# Altium PCB A1_v31.PcbDoc (part 3 of 6)
Units mil, origin at the board's own origin, x right, y up, seen from the top; angles counter-clockwise.
Board outline 3937.01 x 3149.61 mil, 2 copper layers (Top Layer, Bottom Layer); 94 components, 93 nets, 325 pads, 43 vias.
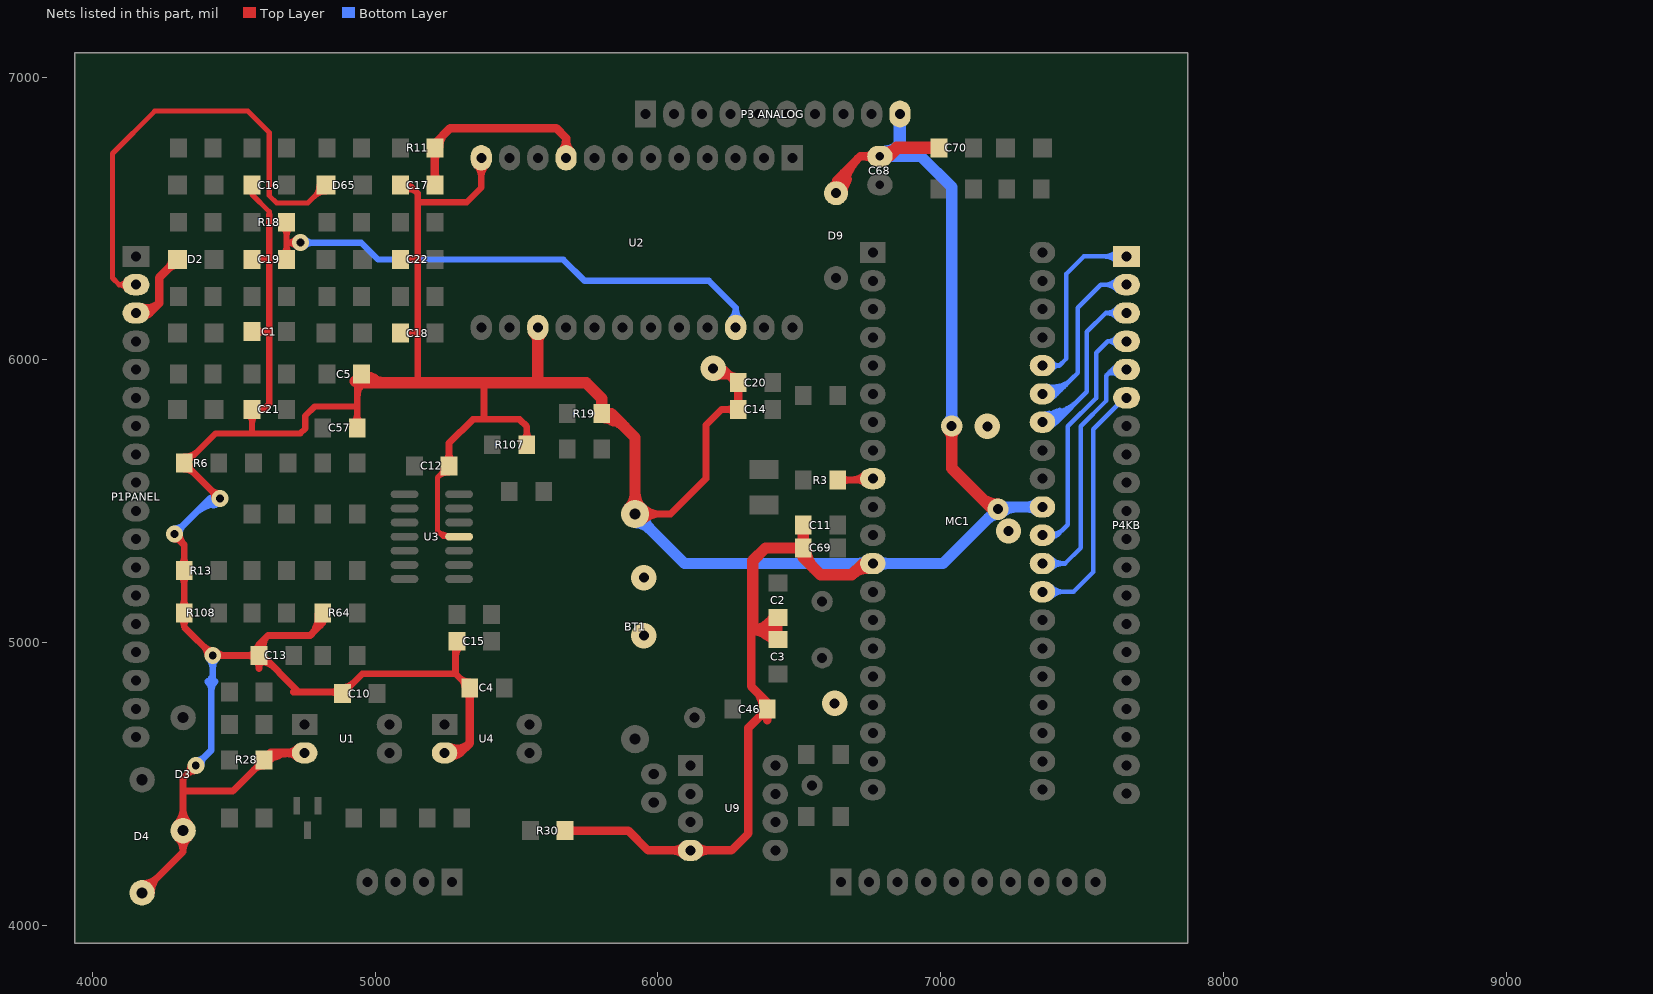
[diagram p3: the nets of this part, all layers, seen from the top]

## Via types
v1: diameter 60, hole 28, Top Layer to Bottom Layer, 30 vias
v2: diameter 90, hole 35.43, Top Layer to Bottom Layer, 6 vias
v3: diameter 75, hole 28, Top Layer to Bottom Layer, 5 vias
v4: diameter 75, hole 35.43, Top Layer to Bottom Layer, 2 vias

## Nets (pads, with @x,y where several pads share a name; then routed paths per layer and width w, separated by ;. In a path a pad name is that pad's centre, name@x,y a point inside that pad or via, vN(x,y) a via of type N, cw(c..) or ccw(c..) an arc to the next point about the centre after c; other vN are vias at no path point) (continued)
GND: "P3 ANALOG.10" BT1.2 C1.1 C2.1 C3.1 C4.1 C5.1 C10.1 C11.1 C12.1 C13.2 C14.1 C15.2 C16.1 C17.1 C18.1 C19.1 C20.1 C21.1 C22.1 C46.1 C57.2 C68.2 C69.1 C70.2 D3.1 D4.1 D9.1 MC1.12 MC1.31 R6.2 R13.1 R19.1 R28.1 R30.2 R64.1 R107.2 R108.1 U1.2 U2.12 U2.15 U3.11 U4.2 U9.4 | length 38769
  Top Layer w18: C16.1@4563.98,6618.61 4563.98,6585.56 4625,6524.54 4625,6515 ; 5246.88,5381.19 ccw(c5254.41,5389.83) U3.11@5259.08,5379.37 ; C12.1@5261.02,5625 5220,5583.98 ; U3.11@5296.46,5375 5240,5375 5220,5395 ; 5220,5395 ccw(c5257.07,5432.07) U3.11@5260.69,5379.77 ; 5220,5395 ccw(c5257.07,5432.07) U3.11@5260.69,5379.77 ; 5220,5395 ccw(c5257.07,5432.07) U3.11@5260.69,5379.77 ; 5220,5395 5220,5583.98 ; 5220,5583.98 cw(c5259.99,5543.99) C12.1@5260.75,5600.54 ; 5220,5583.98 cw(c5259.99,5543.99) C12.1@5260.75,5600.54 ; 5220,5583.98 cw(c5259.99,5543.99) C12.1@5260.75,5600.54 ; 5228.77,5592.74 ccw(c5200.44,5621.06) C12.1@5240.5,5621.06 ; 5228.77,5592.74 ccw(c5200.44,5621.06) C12.1@5240.5,5621.06 ; 5228.77,5592.74 ccw(c5200.44,5621.06) C12.1@5240.5,5621.06 ; 5239.64,5383.88 cw(c5234.41,5357.08) U3.11@5257.06,5372.33 ; 5239.64,5383.88 cw(c5234.41,5357.08) U3.11@5257.06,5372.33 ; 5239.64,5383.88 cw(c5234.41,5357.08) U3.11@5257.06,5372.33
  Top Layer w22: R6.2@4323.98,5635 4330,5635 4435,5740 4735,5740 4752.2,5757.2 4752.2,5802.2 4785,5835 4931.02,5835 4936.02,5840 ; R6.2@4323.98,5657.46 ccw(c4323.98,5726.24) 4372.61,5677.61 ; 4563.98,5748.98 C21.1@4563.98,5825 4605,5825 ; C1.1@4563.98,6100 4625,6100 ; C19.1@4563.98,6355.82 4620.82,6355.82 4625,6360 ; 4625,6515 4625,6360 ; C18.1@5088.98,6095 5150,6095 ; C22.1@5088.98,6355.82 5149.18,6355.82 5150,6355 ; C17.1@5088.98,6618.61 5121.39,6618.61 ; 5150,5919 5150,6095 ; U2.12@5375,6715 5375,6610 5323.14,6558.14 5156.86,6558.14 5150,6565 ; v2(6195,5970) 6233.98,5970 C20.1@6283.98,5920 ; 6243.6,5943.89 ccw(c6263.25,5977.93) C20.1@6277.34,5941.23 ; 6244.32,5956.83 ccw(c6271.8,5972.7) C20.1@6279.49,5941.91 ; 6249.87,5940.27 cw(c6232.47,5910.14) C20.1@6266.08,5919.14 ; C21.1@4550.88,5807.96 cw(c4519.25,5776.33) 4563.98,5776.33 ; C21.1@4550.88,5807.96 cw(c4519.25,5776.33) 4563.98,5776.33 ; C21.1@4550.88,5807.96 cw(c4519.25,5776.33) 4563.98,5776.33 ; 4563.98,5776.33 cw(c4608.71,5776.33) C21.1@4577.08,5807.96 ; 4563.98,5776.33 cw(c4608.71,5776.33) C21.1@4577.08,5807.96 ; 4563.98,5776.33 cw(c4608.71,5776.33) C21.1@4577.08,5807.96 ; C1.1@4577.08,6086.9 cw(c4608.71,6055.27) 4608.71,6100 ; C1.1@4577.08,6086.9 cw(c4608.71,6055.27) 4608.71,6100 ; C1.1@4577.08,6086.9 cw(c4608.71,6055.27) 4608.71,6100 ; C1.1@4577.08,6113.1 ccw(c4608.71,6144.73) 4608.71,6100 ; C1.1@4577.08,6113.1 ccw(c4608.71,6144.73) 4608.71,6100 ; C1.1@4577.08,6113.1 ccw(c4608.71,6144.73) 4608.71,6100 ; C19.1@4577.08,6342.72 cw(c4608.71,6311.09) 4608.71,6355.82 ; C19.1@4577.08,6342.72 cw(c4608.71,6311.09) 4608.71,6355.82 ; C19.1@4577.08,6342.72 cw(c4608.71,6311.09) 4608.71,6355.82 ; C19.1@4577.08,6368.92 ccw(c4608.71,6400.55) 4608.71,6355.82 ; C19.1@4577.08,6368.92 ccw(c4608.71,6400.55) 4608.71,6355.82 ; C19.1@4577.08,6368.92 ccw(c4608.71,6400.55) 4608.71,6355.82 ; C21.1@4577.88,5812.75 cw(c4605,5788.85) 4605,5825 ; C21.1@4577.88,5812.75 cw(c4605,5788.85) 4605,5825 ; C21.1@4577.88,5812.75 cw(c4605,5788.85) 4605,5825 ; C21.1@4577.88,5837.25 ccw(c4605,5861.15) 4605,5825 ; C21.1@4577.88,5837.25 ccw(c4605,5861.15) 4605,5825 ; C21.1@4577.88,5837.25 ccw(c4605,5861.15) 4605,5825 ; 4605,5825 4625,5845 4625,6100 ; 4625,6100 4625,6360 ; C17.1@5087.39,6617.76 cw(c5103.62,6586.24) 5128.69,6611.31 ; C17.1@5087.39,6617.76 cw(c5103.62,6586.24) 5128.69,6611.31 ; C17.1@5087.39,6617.76 cw(c5103.62,6586.24) 5128.69,6611.31 ; C17.1@5097.46,6598.2 cw(c5118.12,6558.12) 5150,6590 ; C17.1@5097.46,6598.2 cw(c5118.12,6558.12) 5150,6590 ; C17.1@5097.46,6598.2 cw(c5118.12,6558.12) 5150,6590 ; C18.1@5102.08,6081.9 cw(c5133.71,6050.27) 5133.71,6095 ; C18.1@5102.08,6081.9 cw(c5133.71,6050.27) 5133.71,6095 ; C18.1@5102.08,6081.9 cw(c5133.71,6050.27) 5133.71,6095 ; C18.1@5102.08,6108.1 ccw(c5133.71,6139.73) 5133.71,6095 ; C18.1@5102.08,6108.1 ccw(c5133.71,6139.73) 5133.71,6095 ; C18.1@5102.08,6108.1 ccw(c5133.71,6139.73) 5133.71,6095 ; C22.1@5102.08,6342.72 cw(c5133.71,6311.09) 5133.71,6355.82 ; C22.1@5102.08,6342.72 cw(c5133.71,6311.09) 5133.71,6355.82 ; C22.1@5102.08,6342.72 cw(c5133.71,6311.09) 5133.71,6355.82 ; C22.1@5102.08,6368.92 ccw(c5133.71,6400.55) 5133.71,6355.82 ; C22.1@5102.08,6368.92 ccw(c5133.71,6400.55) 5133.71,6355.82 ; C22.1@5102.08,6368.92 ccw(c5133.71,6400.55) 5133.71,6355.82 ; C17.1@5104.94,6609.2 cw(c5121.39,6599.51) 5121.39,6618.61 ; C17.1@5104.94,6609.2 cw(c5121.39,6599.51) 5121.39,6618.61 ; C17.1@5104.94,6609.2 cw(c5121.39,6599.51) 5121.39,6618.61 ; C17.1@5104.94,6628.01 ccw(c5121.39,6637.7) 5121.39,6618.61 ; C17.1@5104.94,6628.01 ccw(c5121.39,6637.7) 5121.39,6618.61 ; C17.1@5104.94,6628.01 ccw(c5121.39,6637.7) 5121.39,6618.61 ; 5121.39,6618.61 5150,6590 ; 5150,6095 5150,6355 ; 5150,6355 5150,6565 ; 5150,6565 5150,6590 ; U2.12@5356.26,6688.76 cw(c5311.02,6643.52) 5375,6643.52 ; U2.12@5356.26,6688.76 cw(c5311.02,6643.52) 5375,6643.52 ; U2.12@5356.26,6688.76 cw(c5311.02,6643.52) 5375,6643.52 ; 5375,6643.52 cw(c5438.98,6643.52) U2.12@5393.74,6688.76 ; 5375,6643.52 cw(c5438.98,6643.52) U2.12@5393.74,6688.76 ; 5375,6643.52 cw(c5438.98,6643.52) U2.12@5393.74,6688.76 ; v2@6188.46,5962.44 ccw(c6246.03,6028.97) 6252.37,5941.22 ; v2@6188.46,5962.44 ccw(c6246.03,6028.97) 6252.37,5941.22 ; v2@6188.46,5962.44 ccw(c6246.03,6028.97) 6252.37,5941.22 ; v2@6198.93,5958.66 cw(c6218,5903.69) C20.1@6259.14,5944.84 ; v2@6198.93,5958.66 cw(c6218,5903.69) C20.1@6259.14,5944.84 ; v2@6198.93,5958.66 cw(c6218,5903.69) C20.1@6259.14,5944.84 ; v2@6201.08,5959.65 cw(c6217.13,5932.31) 6239.55,5954.73 ; v2@6201.08,5959.65 cw(c6217.13,5932.31) 6239.55,5954.73 ; v2@6201.08,5959.65 cw(c6217.13,5932.31) 6239.55,5954.73 ; v2@6201.08,5959.65 cw(c6217.13,5932.31) 6239.55,5954.73 ; v2@6206.14,5937.88 cw(c6230.79,5866.82) C20.1@6283.98,5920 ; v2@6206.14,5937.88 cw(c6230.79,5866.82) C20.1@6283.98,5920 ; v2@6206.14,5937.88 cw(c6230.79,5866.82) C20.1@6283.98,5920 ; v2@6212.21,5940.68 cw(c6232.02,5906.95) C20.1@6259.67,5934.61 ; v2@6212.21,5940.68 cw(c6232.02,5906.95) C20.1@6259.67,5934.61 ; v2@6212.21,5940.68 cw(c6232.02,5906.95) C20.1@6259.67,5934.61 ; v2@6212.21,5940.68 cw(c6232.02,5906.95) C20.1@6259.67,5934.61 ; v2@6236.2,5958.08 cw(c6204.14,5902.55) C20.1@6266.08,5919.14 ; v2@6236.2,5958.08 cw(c6204.14,5902.55) C20.1@6266.08,5919.14 ; v2@6236.2,5958.08 cw(c6204.14,5902.55) C20.1@6266.08,5919.14 ; 6245.63,5958.35 ccw(c6283.98,5996.7) C20.1@6283.98,5942.46 ; 6245.63,5958.35 ccw(c6283.98,5996.7) C20.1@6283.98,5942.46 ; 6245.63,5958.35 ccw(c6283.98,5996.7) C20.1@6283.98,5942.46 ; 6251.96,5938.48 cw(c6237.19,5912.9) C20.1@6265.94,5919.68 ; 6251.96,5938.48 ccw(c6262.14,5956.12) C20.1@6273.57,5939.27 ; 6251.96,5938.48 cw(c6237.19,5912.9) C20.1@6265.94,5919.68 ; 6251.96,5938.48 ccw(c6262.14,5956.12) C20.1@6273.57,5939.27 ; 6251.96,5938.48 ccw(c6262.14,5956.12) C20.1@6273.57,5939.27 ; 6251.96,5938.48 cw(c6237.19,5912.9) C20.1@6265.94,5919.68 ; C20.1@6255.13,5948.84 cw(c6230.22,5923.94) C20.1@6265.45,5923.94 ; C20.1@6255.13,5948.84 cw(c6230.22,5923.94) C20.1@6265.45,5923.94 ; C20.1@6255.13,5948.84 cw(c6230.22,5923.94) C20.1@6265.45,5923.94 ; C20.1@6259.96,5944.36 ccw(c6272.62,5966.3) C20.1@6279.18,5941.83 ; C20.1@6259.96,5944.36 ccw(c6272.62,5966.3) C20.1@6279.18,5941.83 ; C20.1@6259.96,5944.36 ccw(c6272.62,5966.3) C20.1@6279.18,5941.83
  Top Layer w24: D4.1@4175,4115 4320,4260 ; v1(4290,5385) 4290,5380 4323.98,5346.02 R13.1@4323.98,5255 R108.1@4323.98,5105 4323.98,5056.02 v1(4425,4955) C13.2@4588.98,4955 ; R6.2@4323.98,5635 4448.98,5510 v1(4450,5510) ; v1(4365,4565) 4320,4520 4320,4475 ; v1@4407,4955 ccw(c4363.54,4955) 4394.27,4985.73 ccw(c4425,5016.46) v1@4425,4973 ; v1@4437.73,4967.73 ccw(c4468.46,4998.46) 4468.46,4955 ; C13.2@4588.98,4933.54 cw(c4588.98,4855.1) 4644.44,4910.56 ; C13.2@4588.98,4946.02 C13.2@4588.98,4955 ; C13.2@4598.98,4956.02 4720,4835 ; R28.1@4606.02,4585 4496.02,4475 4320,4475 ; 4710,4825 4868.98,4825 4883.98,4840 C10.1@4886.46,4840 ; R64.1@4813.98,5105 4813.98,5068.98 ; C10.1@4883.98,4820 4953.98,4890 5283.98,4890 ; C57.2@4939.02,5743 4936.02,5740 C57.2@4936.02,5760 4936.02,5840 4936.02,5935 C5.1@4951.02,5950 ; C12.1@5261.02,5625 5261.02,5706.02 5345,5790 5385,5790 ; C15.2@5288.98,4975 5283.98,4970 5283.98,4890 ; C4.1@5333.98,4840 5283.98,4890 ; 5385,5919 5385,5790 ; R107.2@5536.02,5700 5536.02,5763.98 5510,5790 5385,5790 ; BT1.2@5919,5454.99 6044.99,5454.99 6170,5580 6170,5770 6225,5825 C14.1@6283.98,5825 ; D4.1@4175,4148 ccw(c4175,4227.67) 4231.33,4171.33 ; D4.1@4175,4148 ccw(c4175,4227.67) 4231.33,4171.33 ; D4.1@4175,4148 ccw(c4175,4227.67) 4231.33,4171.33 ; D4.1@4208,4115 cw(c4287.67,4115) 4231.33,4171.33 ; D4.1@4208,4115 cw(c4287.67,4115) 4231.33,4171.33 ; D4.1@4208,4115 cw(c4287.67,4115) 4231.33,4171.33 ; v1@4290,5367 cw(c4290,5335.62) 4312.19,5357.81 ; v1@4290,5367 cw(c4290,5335.62) 4312.19,5357.81 ; v1@4290,5367 cw(c4290,5335.62) 4312.19,5357.81 ; D3.1@4296.67,4358.33 ccw(c4240.33,4414.67) 4320,4414.67 ; D3.1@4296.67,4358.33 ccw(c4240.33,4414.67) 4320,4414.67 ; D3.1@4296.67,4358.33 ccw(c4240.33,4414.67) 4320,4414.67 ; D3.1@4297.71,4310.67 cw(c4251.28,4260) 4320,4260 ; D3.1@4297.71,4310.67 cw(c4251.28,4260) 4320,4260 ; D3.1@4297.71,4310.67 cw(c4251.28,4260) 4320,4260 ; v1@4308,5384.9 ccw(c4362.54,5384.59) 4323.97,5346.03 ; v1@4308,5384.9 ccw(c4362.54,5384.59) 4323.97,5346.03 ; v1@4308,5384.9 ccw(c4362.54,5384.59) 4323.97,5346.03 ; R108.1@4311.58,5088.67 cw(c4281.66,5058.75) 4323.98,5058.75 ; R108.1@4311.58,5088.67 cw(c4281.66,5058.75) 4323.98,5058.75 ; R108.1@4311.58,5088.67 cw(c4281.66,5058.75) 4323.98,5058.75 ; R108.1@4311.58,5121.33 ccw(c4281.66,5151.25) 4323.98,5151.25 ; R108.1@4311.58,5121.33 ccw(c4281.66,5151.25) 4323.98,5151.25 ; R108.1@4311.58,5121.33 ccw(c4281.66,5151.25) 4323.98,5151.25 ; R13.1@4311.58,5238.67 cw(c4281.66,5208.75) 4323.98,5208.75 ; R13.1@4311.58,5238.67 cw(c4281.66,5208.75) 4323.98,5208.75 ; R13.1@4311.58,5238.67 cw(c4281.66,5208.75) 4323.98,5208.75 ; R13.1@4311.58,5271.33 ccw(c4281.66,5301.25) 4323.98,5301.25 ; R13.1@4311.58,5271.33 ccw(c4281.66,5301.25) 4323.98,5301.25 ; R13.1@4311.58,5271.33 ccw(c4281.66,5301.25) 4323.98,5301.25 ; 4320,4260 cw(c4388.72,4260) D3.1@4342.29,4310.67 ; 4320,4260 cw(c4388.72,4260) D3.1@4342.29,4310.67 ; 4320,4260 cw(c4388.72,4260) D3.1@4342.29,4310.67 ; 4320,4260 D3.1@4320,4335 4320,4475 ; 4320,4414.67 ccw(c4399.67,4414.67) D3.1@4343.33,4358.33 ; 4320,4414.67 ccw(c4399.67,4414.67) D3.1@4343.33,4358.33 ; 4320,4414.67 ccw(c4399.67,4414.67) D3.1@4343.33,4358.33 ; 4323.98,5058.75 cw(c4366.29,5058.75) R108.1@4336.37,5088.67 ; 4323.98,5058.75 cw(c4366.29,5058.75) R108.1@4336.37,5088.67 ; 4323.98,5058.75 cw(c4366.29,5058.75) R108.1@4336.37,5088.67 ; 4323.98,5151.25 ccw(c4366.29,5151.25) R108.1@4336.37,5121.33 ; 4323.98,5151.25 ccw(c4366.29,5151.25) R108.1@4336.37,5121.33 ; 4323.98,5151.25 ccw(c4366.29,5151.25) R108.1@4336.37,5121.33 ; 4323.98,5208.75 cw(c4366.29,5208.75) R13.1@4336.37,5238.67 ; 4323.98,5208.75 cw(c4366.29,5208.75) R13.1@4336.37,5238.67 ; 4323.98,5208.75 cw(c4366.29,5208.75) R13.1@4336.37,5238.67 ; 4323.98,5301.25 ccw(c4366.29,5301.25) R13.1@4336.37,5271.33 ; 4323.98,5301.25 ccw(c4366.29,5301.25) R13.1@4336.37,5271.33 ; 4323.98,5301.25 ccw(c4366.29,5301.25) R13.1@4336.37,5271.33 ; R6.2@4323.98,5613.54 cw(c4323.98,5561.72) 4360.62,5598.36 ; R6.2@4323.98,5613.54 cw(c4323.98,5561.72) 4360.62,5598.36 ; R6.2@4323.98,5613.54 cw(c4323.98,5561.72) 4360.62,5598.36 ; 4334.27,4534.27 cw(c4365,4503.54) v1@4365,4547 ; 4334.27,4534.27 ccw(c4303.54,4565) v1@4347,4565 ; 4334.27,4534.27 ccw(c4303.54,4565) v1@4347,4565 ; 4334.27,4534.27 cw(c4365,4503.54) v1@4365,4547 ; 4334.27,4534.27 ccw(c4303.54,4565) v1@4347,4565 ; 4334.27,4534.27 cw(c4365,4503.54) v1@4365,4547 ; R6.2@4341.5,5631.06 ccw(c4374.31,5631.06) R6.2@4351.11,5607.86 ; R6.2@4341.5,5631.06 ccw(c4374.31,5631.06) R6.2@4351.11,5607.86 ; R6.2@4341.5,5631.06 ccw(c4374.31,5631.06) R6.2@4351.11,5607.86 ; 4417.52,5541.45 ccw(c4450,5573.93) v1@4450,5528 ; 4417.52,5541.45 ccw(c4450,5573.93) v1@4450,5528 ; 4417.52,5541.45 ccw(c4450,5573.93) v1@4450,5528 ; 4420,5538.98 cw(c4391.02,5510) v1@4432,5510 ; 4420,5538.98 cw(c4391.02,5510) v1@4432,5510 ; 4420,5538.98 cw(c4391.02,5510) v1@4432,5510 ; 4546.66,4955 cw(c4546.66,4912.68) C13.2@4576.58,4942.61 ; 4546.66,4955 ccw(c4546.66,4997.32) C13.2@4576.58,4967.39 ; 4546.66,4955 ccw(c4546.66,4997.32) C13.2@4576.58,4967.39 ; 4546.66,4955 cw(c4546.66,4912.68) C13.2@4576.58,4942.61 ; 4546.66,4955 ccw(c4546.66,4997.32) C13.2@4576.58,4967.39 ; 4546.66,4955 cw(c4546.66,4912.68) C13.2@4576.58,4942.61 ; 4569.38,4548.36 cw(c4606.02,4511.72) R28.1@4606.02,4563.54 ; 4569.38,4548.36 cw(c4606.02,4511.72) R28.1@4606.02,4563.54 ; 4569.38,4548.36 cw(c4606.02,4511.72) R28.1@4606.02,4563.54 ; C13.2@4578.47,4972.96 ccw(c4562.72,4993.97) 4588.98,4993.97 ; C13.2@4578.47,4972.96 ccw(c4562.72,4993.97) 4588.98,4993.97 ; C13.2@4578.47,4972.96 ccw(c4562.72,4993.97) 4588.98,4993.97 ; R28.1@4578.89,4557.86 ccw(c4555.69,4581.06) R28.1@4588.5,4581.06 ; R28.1@4578.89,4557.86 ccw(c4555.69,4581.06) R28.1@4588.5,4581.06 ; R28.1@4578.89,4557.86 ccw(c4555.69,4581.06) R28.1@4588.5,4581.06 ; C13.2@4582.83,4956.91 cw(c4620.55,4969.37) 4592.46,4997.46 ; C13.2@4582.83,4956.91 cw(c4620.55,4969.37) 4592.46,4997.46 ; C13.2@4582.83,4956.91 cw(c4620.55,4969.37) 4592.46,4997.46 ; 4588.98,4908.75 ccw(c4546.66,4908.75) 4576.58,4938.67 cw(c4546.66,4908.75) 4588.98,4908.75 ; 4588.98,4908.75 cw(c4631.29,4908.75) 4601.37,4938.67 ccw(c4631.29,4908.75) 4588.98,4908.75 ; C13.2@4588.98,4955 4588.98,4993.98 4620,5025 ; 4588.98,4993.97 ccw(c4615.23,4993.97) C13.2@4599.49,4972.96 ; 4588.98,4993.97 ccw(c4615.23,4993.97) C13.2@4599.49,4972.96 ; 4588.98,4993.97 ccw(c4615.23,4993.97) C13.2@4599.49,4972.96 ; C13.2@4593.81,4954.63 ccw(c4562.32,4982.7) C13.2@4604.43,4985.11 ; C13.2@4593.81,4954.63 ccw(c4562.32,4982.7) C13.2@4604.43,4985.11 ; C13.2@4593.81,4954.63 ccw(c4562.32,4982.7) C13.2@4604.43,4985.11 ; C13.2@4605.62,4964.44 cw(c4661.95,4983.05) 4620,5025 ; C13.2@4605.62,4964.44 cw(c4661.95,4983.05) 4620,5025 ; C13.2@4605.62,4964.44 cw(c4661.95,4983.05) 4620,5025 ; 4620,5025 4770,5025 ; 4770,5025 ccw(c4704.84,5090.16) R64.1@4796.54,5099.32 ; 4770,5025 ccw(c4704.84,5090.16) R64.1@4796.54,5099.32 ; 4770,5025 ccw(c4704.84,5090.16) R64.1@4796.54,5099.32 ; 4770,5025 4813.98,5068.98 ; R64.1@4804.51,5086.31 cw(c4793.37,5068.98) 4813.98,5068.98 ; R64.1@4804.51,5086.31 cw(c4793.37,5068.98) 4813.98,5068.98 ; R64.1@4804.51,5086.31 cw(c4793.37,5068.98) 4813.98,5068.98 ; 4805.82,5060.82 ccw(c4769.97,5096.67) R64.1@4820.42,5101.71 ; 4805.82,5060.82 ccw(c4769.97,5096.67) R64.1@4820.42,5101.71 ; 4805.82,5060.82 ccw(c4769.97,5096.67) R64.1@4820.42,5101.71 ; 4813.98,5068.98 cw(c4834.58,5068.98) R64.1@4823.45,5086.31 ; 4813.98,5068.98 cw(c4834.58,5068.98) R64.1@4823.45,5086.31 ; 4813.98,5068.98 cw(c4834.58,5068.98) R64.1@4823.45,5086.31 ; 4839.09,4825 cw(c4839.09,4779.06) C10.1@4871.58,4811.54 ; 4839.09,4825 cw(c4839.09,4779.06) C10.1@4871.58,4811.54 ; 4839.09,4825 cw(c4839.09,4779.06) C10.1@4871.58,4811.54 ; 4844.23,4825 ccw(c4844.23,4863.69) C10.1@4871.58,4836.33 ; 4844.23,4825 ccw(c4844.23,4863.69) C10.1@4871.58,4836.33 ; 4844.23,4825 ccw(c4844.23,4863.69) C10.1@4871.58,4836.33 ; C10.1@4883.98,4841.46 ccw(c4883.98,4893.28) 4920.62,4856.64 ; C10.1@4883.98,4841.46 ccw(c4883.98,4893.28) 4920.62,4856.64 ; C10.1@4883.98,4841.46 ccw(c4883.98,4893.28) 4920.62,4856.64 ; C10.1@4901.5,4823.94 cw(c4934.31,4823.94) C10.1@4911.11,4847.14 ; C10.1@4901.5,4823.94 cw(c4934.31,4823.94) C10.1@4911.11,4847.14 ; C10.1@4901.5,4823.94 cw(c4934.31,4823.94) C10.1@4911.11,4847.14 ; C57.2@4923.63,5776.33 ccw(c4893.71,5806.25) 4936.02,5806.25 ; C57.2@4923.63,5776.33 ccw(c4893.71,5806.25) 4936.02,5806.25 ; C57.2@4923.63,5776.33 ccw(c4893.71,5806.25) 4936.02,5806.25 ; 4936.02,5806.25 ccw(c4978.34,5806.25) C57.2@4948.42,5776.33 ; 4936.02,5806.25 ccw(c4978.34,5806.25) C57.2@4948.42,5776.33 ; 4936.02,5806.25 ccw(c4978.34,5806.25) C57.2@4948.42,5776.33 ; 4936.02,5867.53 cw(c5029.55,5867.53) C5.1@4963.42,5933.67 ; 4936.02,5867.53 cw(c5029.55,5867.53) C5.1@4963.42,5933.67 ; 4936.02,5867.53 cw(c5029.55,5867.53) C5.1@4963.42,5933.67 ; C5.1@4939.11,5933.21 cw(c4920.93,5913.58) 4944.1,5900.21 ; C5.1@4939.11,5933.21 cw(c4920.93,5913.58) 4944.1,5900.21 ; C5.1@4939.11,5933.21 cw(c4920.93,5913.58) 4944.1,5900.21 ; C12.1@5248.63,5641.33 ccw(c5218.71,5671.25) 5261.02,5671.25 ; C12.1@5248.63,5641.33 ccw(c5218.71,5671.25) 5261.02,5671.25 ; C12.1@5248.63,5641.33 ccw(c5218.71,5671.25) 5261.02,5671.25 ; 5261.02,5671.25 ccw(c5303.34,5671.25) C12.1@5273.42,5641.33 ; 5261.02,5671.25 ccw(c5303.34,5671.25) C12.1@5273.42,5641.33 ; 5261.02,5671.25 ccw(c5303.34,5671.25) C12.1@5273.42,5641.33 ; C15.2@5276.58,4988.67 cw(c5258.73,4970.82) 5283.98,4970.82 ; C15.2@5276.58,4988.67 cw(c5258.73,4970.82) 5283.98,4970.82 ; C15.2@5276.58,4988.67 cw(c5258.73,4970.82) 5283.98,4970.82 ; C15.2@5276.58,4988.67 cw(c5258.73,4970.82) 5283.98,4970.82 ; C15.2@5276.58,4988.67 cw(c5258.73,4970.82) 5283.98,4970.82 ; C15.2@5276.58,4988.67 cw(c5258.73,4970.82) 5283.98,4970.82 ; 5283.98,4946.68 cw(c5343.36,4946.68) C15.2@5301.37,4988.67 ; 5283.98,4946.68 cw(c5343.36,4946.68) C15.2@5301.37,4988.67 ; 5283.98,4946.68 cw(c5343.36,4946.68) C15.2@5301.37,4988.67 ; 5283.98,4969.6 cw(c5299.68,4969.6) C15.2@5294.62,4984.47 ; 5283.98,4969.6 cw(c5299.68,4969.6) C15.2@5294.62,4984.47 ; 5283.98,4969.6 cw(c5299.68,4969.6) C15.2@5294.62,4984.47 ; 5297.33,4876.64 ccw(c5333.98,4913.28) C4.1@5333.98,4861.46 ; 5297.33,4876.64 ccw(c5333.98,4913.28) C4.1@5333.98,4861.46 ; 5297.33,4876.64 ccw(c5333.98,4913.28) C4.1@5333.98,4861.46 ; C4.1@5306.84,4867.14 cw(c5283.64,4843.94) C4.1@5316.45,4843.94 ; C4.1@5306.84,4867.14 cw(c5283.64,4843.94) C4.1@5316.45,4843.94 ; C4.1@5306.84,4867.14 cw(c5283.64,4843.94) C4.1@5316.45,4843.94 ; R107.2@5523.63,5716.33 ccw(c5493.71,5746.25) 5536.02,5746.25 ; R107.2@5523.63,5716.33 ccw(c5493.71,5746.25) 5536.02,5746.25 ; R107.2@5523.63,5716.33 ccw(c5493.71,5746.25) 5536.02,5746.25 ; 5536.02,5746.25 ccw(c5578.34,5746.25) R107.2@5548.42,5716.33 ; 5536.02,5746.25 ccw(c5578.34,5746.25) R107.2@5548.42,5716.33 ; 5536.02,5746.25 ccw(c5578.34,5746.25) R107.2@5548.42,5716.33 ; BT1.2@5945.87,5428.12 cw(c6010.74,5363.25) 6010.74,5454.99 ; BT1.2@5945.87,5428.12 cw(c6010.74,5363.25) 6010.74,5454.99 ; BT1.2@5945.87,5428.12 cw(c6010.74,5363.25) 6010.74,5454.99 ; BT1.2@5945.87,5481.86 ccw(c6010.74,5546.73) 6010.74,5454.99 ; BT1.2@5945.87,5481.86 ccw(c6010.74,5546.73) 6010.74,5454.99 ; BT1.2@5945.87,5481.86 ccw(c6010.74,5546.73) 6010.74,5454.99 ; 6241.66,5825 cw(c6241.66,5782.68) C14.1@6271.58,5812.61 ; 6241.66,5825 ccw(c6241.66,5867.32) C14.1@6271.58,5837.39 ; 6241.66,5825 ccw(c6241.66,5867.32) C14.1@6271.58,5837.39 ; 6241.66,5825 cw(c6241.66,5782.68) C14.1@6271.58,5812.61 ; 6241.66,5825 ccw(c6241.66,5867.32) C14.1@6271.58,5837.39 ; 6241.66,5825 cw(c6241.66,5782.68) C14.1@6271.58,5812.61
  Top Layer w30: R28.1@4606.02,4585 4631.02,4610 U1.2@4750,4610 ; U4.2@5245,4610 5300,4610 ; C4.1@5333.98,4840 5333.98,4643.98 5300,4610 ; R30.2@5671.02,4335 5895,4335 5965,4265 U9.4@6115,4265 6260,4265 6320,4325 6320,4698.98 C46.1@6386.02,4765 6386.02,4788.98 6330,4845 6330,5285 6335,5290 ; R30.2@5681.3,4324.73 cw(c5706.1,4299.93) 5706.1,4335 cw(c5706.1,4370.07) R30.2@5681.3,4345.27 ; U9.4@6091.59,4249.09 ccw(c6053.18,4210.68) 6053.18,4265 ccw(c6053.18,4319.32) U9.4@6091.59,4280.91 ; U9.4@6138.41,4249.09 cw(c6176.82,4210.68) 6176.82,4265 cw(c6176.82,4319.32) U9.4@6138.41,4280.91 ; C14.1@6283.98,5825 C20.1@6283.98,5920 ; 6354.5,4733.48 cw(c6386.02,4701.96) C46.1@6386.02,4746.54 ; C3.1@6425,5011.02 C2.1@6425,5088.98 ; D9.1@6630,6565 D9.1@6630,6590 6630,6635 ; D9.1@6641.38,6615.04 ccw(c6649.08,6631.98) 6662.24,6618.82 ccw(c6677.93,6603.13) D9.1@6656.52,6597.26 ; C68.2@6815,6720 C68.2@6785,6720 6715,6720 6630,6635 ; R28.1@4612.95,4601.71 ccw(c4634.56,4641.58) 4657.24,4602.3 ; R28.1@4612.95,4601.71 ccw(c4634.56,4641.58) 4657.24,4602.3 ; R28.1@4612.95,4601.71 ccw(c4634.56,4641.58) 4657.24,4602.3 ; R28.1@4616.3,4578.66 cw(c4691.95,4503.01) 4691.95,4610 ; R28.1@4616.3,4578.66 cw(c4691.95,4503.01) 4691.95,4610 ; R28.1@4616.3,4578.66 cw(c4691.95,4503.01) 4691.95,4610 ; 4688.18,4610 cw(c4688.18,4555.68) U1.2@4726.59,4594.09 ; 4688.18,4610 ccw(c4688.18,4664.32) U1.2@4726.59,4625.91 ; 4688.18,4610 ccw(c4688.18,4664.32) U1.2@4726.59,4625.91 ; 4688.18,4610 cw(c4688.18,4555.68) U1.2@4726.59,4594.09 ; 4688.18,4610 ccw(c4688.18,4664.32) U1.2@4726.59,4625.91 ; 4688.18,4610 cw(c4688.18,4555.68) U1.2@4726.59,4594.09 ; U4.2@5249.45,4603.15 ccw(c5269.03,4647.16) 5303.1,4613.1 ; U4.2@5249.45,4603.15 ccw(c5269.03,4647.16) 5303.1,4613.1 ; U4.2@5249.45,4603.15 ccw(c5269.03,4647.16) 5303.1,4613.1 ; U4.2@5261.65,4630.56 ccw(c5288.05,4689.9) 5333.97,4643.97 ; U4.2@5261.65,4630.56 ccw(c5288.05,4689.9) 5333.97,4643.97 ; U4.2@5261.65,4630.56 ccw(c5288.05,4689.9) 5333.97,4643.97 ; U4.2@5269.91,4595.75 cw(c5300,4571.11) 5300,4610 ; U4.2@5269.91,4595.75 cw(c5300,4571.11) 5300,4610 ; U4.2@5269.91,4595.75 cw(c5300,4571.11) 5300,4610 ; U4.2@5269.91,4624.25 ccw(c5300,4648.89) 5300,4610 ; U4.2@5269.91,4624.25 ccw(c5300,4648.89) 5300,4610 ; U4.2@5269.91,4624.25 ccw(c5300,4648.89) 5300,4610 ; C4.1@5323.7,4825.79 cw(c5298.9,4800.99) 5333.98,4800.99 ; C4.1@5323.7,4825.79 cw(c5298.9,4800.99) 5333.98,4800.99 ; C4.1@5323.7,4825.79 cw(c5298.9,4800.99) 5333.98,4800.99 ; 5333.98,4800.99 cw(c5369.05,4800.99) C4.1@5344.25,4825.79 ; 5333.98,4800.99 cw(c5369.05,4800.99) C4.1@5344.25,4825.79 ; 5333.98,4800.99 cw(c5369.05,4800.99) C4.1@5344.25,4825.79 ; C14.1@6273.7,5839.21 ccw(c6248.9,5864.01) 6283.98,5864.01 ; C14.1@6273.7,5839.21 ccw(c6248.9,5864.01) 6283.98,5864.01 ; C14.1@6273.7,5839.21 ccw(c6248.9,5864.01) 6283.98,5864.01 ; C20.1@6273.7,5905.79 cw(c6248.9,5880.99) 6283.98,5880.99 ; C20.1@6273.7,5905.79 cw(c6248.9,5880.99) 6283.98,5880.99 ; C20.1@6273.7,5905.79 cw(c6248.9,5880.99) 6283.98,5880.99 ; 6283.98,5864.01 ccw(c6319.05,5864.01) C14.1@6294.25,5839.21 ; 6283.98,5864.01 ccw(c6319.05,5864.01) C14.1@6294.25,5839.21 ; 6283.98,5864.01 ccw(c6319.05,5864.01) C14.1@6294.25,5839.21 ; 6283.98,5880.99 cw(c6319.05,5880.99) C20.1@6294.25,5905.79 ; 6283.98,5880.99 cw(c6319.05,5880.99) C20.1@6294.25,5905.79 ; 6283.98,5880.99 cw(c6319.05,5880.99) C20.1@6294.25,5905.79 ; 6347.05,4827.95 cw(c6288.05,4768.94) C46.1@6371.5,4768.94 ; 6347.05,4827.95 cw(c6288.05,4768.94) C46.1@6371.5,4768.94 ; 6347.05,4827.95 cw(c6288.05,4768.94) C46.1@6371.5,4768.94 ; 6386.02,4725.99 ccw(c6350.95,4725.99) 6375.75,4750.79 cw(c6350.95,4725.99) 6386.02,4725.99 ; 6386.02,4725.99 cw(c6421.1,4725.99) 6396.3,4750.79 ccw(c6421.1,4725.99) 6386.02,4725.99 ; C3.1@6414.73,5021.3 ccw(c6389.93,5046.1) 6425,5046.1 ; C3.1@6414.73,5021.3 ccw(c6389.93,5046.1) 6425,5046.1 ; C3.1@6414.73,5021.3 ccw(c6389.93,5046.1) 6425,5046.1 ; C2.1@6414.73,5078.7 cw(c6389.93,5053.9) 6425,5053.9 ; C2.1@6414.73,5078.7 cw(c6389.93,5053.9) 6425,5053.9 ; C2.1@6414.73,5078.7 cw(c6389.93,5053.9) 6425,5053.9 ; 6425,5046.1 ccw(c6460.07,5046.1) C3.1@6435.27,5021.3 ; 6425,5046.1 ccw(c6460.07,5046.1) C3.1@6435.27,5021.3 ; 6425,5046.1 ccw(c6460.07,5046.1) C3.1@6435.27,5021.3 ; 6425,5053.9 cw(c6460.07,5053.9) C2.1@6435.27,5078.7 ; 6425,5053.9 cw(c6460.07,5053.9) C2.1@6435.27,5078.7 ; 6425,5053.9 cw(c6460.07,5053.9) C2.1@6435.27,5078.7 ; D9.1@6617.46,6614.47 ccw(c6606.93,6635) 6630,6635 ; D9.1@6617.46,6614.47 ccw(c6606.93,6635) 6630,6635 ; D9.1@6617.46,6614.47 ccw(c6606.93,6635) 6630,6635 ; D9.1@6620.55,6615.83 ccw(c6609.73,6645.41) 6640.16,6637.26 ; D9.1@6620.55,6615.83 ccw(c6609.73,6645.41) 6640.16,6637.26 ; D9.1@6620.55,6615.83 ccw(c6609.73,6645.41) 6640.16,6637.26 ; D9.1@6627.5,6590 cw(c6730.1,6590) 6657.55,6662.55 ; D9.1@6627.5,6590 cw(c6730.1,6590) 6657.55,6662.55 ; D9.1@6627.5,6590 cw(c6730.1,6590) 6657.55,6662.55 ; 6630,6635 ccw(c6653.07,6635) D9.1@6642.54,6614.47 ; 6630,6635 ccw(c6653.07,6635) D9.1@6642.54,6614.47 ; 6630,6635 ccw(c6653.07,6635) D9.1@6642.54,6614.47 ; D9.1@6631.25,6587.83 ccw(c6588.92,6661.15) 6670.69,6639.24 ; D9.1@6631.25,6587.83 ccw(c6588.92,6661.15) 6670.69,6639.24 ; D9.1@6631.25,6587.83 ccw(c6588.92,6661.15) 6670.69,6639.24 ; 6640.16,6637.26 ccw(c6665.68,6630.42) D9.1@6648.2,6610.62 ; 6640.16,6637.26 ccw(c6665.68,6630.42) D9.1@6648.2,6610.62 ; 6640.16,6637.26 ccw(c6665.68,6630.42) D9.1@6648.2,6610.62 ; D9.1@6657.5,6590 cw(c6832.53,6590) 6708.77,6713.77 ; D9.1@6657.5,6590 cw(c6832.53,6590) 6708.77,6713.77 ; D9.1@6657.5,6590 cw(c6832.53,6590) 6708.77,6713.77 ; 6730.68,6720 cw(c6730.68,6665.68) C68.2@6769.09,6704.09 ; 6730.68,6720 ccw(c6730.68,6774.32) C68.2@6769.09,6735.91 ; 6730.68,6720 ccw(c6730.68,6774.32) C68.2@6769.09,6735.91 ; 6730.68,6720 cw(c6730.68,6665.68) C68.2@6769.09,6704.09 ; 6730.68,6720 ccw(c6730.68,6774.32) C68.2@6769.09,6735.91 ; 6730.68,6720 cw(c6730.68,6665.68) C68.2@6769.09,6704.09
  Top Layer w40: C5.1@4951.02,5950 4951.02,5919 5150,5919 5385,5919 5574,5919 ; C5.1@4959.5,5950.41 ccw(c4981.66,5961.75) 4981.66,5936.86 ; U2.15@5575,6115 5575,5920 5574,5919 ; BT1.2@5919,5454.99 5919,5726 5835,5810 R19.1@5801.02,5810 5801.02,5863.98 5746,5919 5574,5919 ; 6420,5045 6335,5045 ; C11.1@6513.98,5416 C69.1@6513.98,5335 ; MC1.12@6760,5280 6725,5280 6685,5240 ; v4(7039,5766) 7039,5617 7184,5472 v4(7203,5472) ; C5.1@4929.48,5924.52 ccw(c4942.79,5937.83) C5.1@4942.79,5919 ; C5.1@4929.48,5924.52 ccw(c4942.79,5937.83) C5.1@4942.79,5919 ; C5.1@4929.48,5924.52 ccw(c4942.79,5937.83) C5.1@4942.79,5919 ; C5.1@4953.49,5936.86 cw(c4967.58,5884.29) 4994.79,5931.42 ; C5.1@4953.49,5936.86 cw(c4967.58,5884.29) 4994.79,5931.42 ; C5.1@4953.49,5936.86 cw(c4967.58,5884.29) 4994.79,5931.42 ; C5.1@4957.76,5952.8 ccw(c5039.36,6034.4) 5039.36,5919 ; C5.1@4957.76,5952.8 ccw(c5039.36,6034.4) 5039.36,5919 ; C5.1@4957.76,5952.8 ccw(c5039.36,6034.4) 5039.36,5919 ; U2.15@5562.63,6095.13 cw(c5532.75,6065.25) 5575,6065.25 ; U2.15@5562.63,6095.13 cw(c5532.75,6065.25) 5575,6065.25 ; U2.15@5562.63,6095.13 cw(c5532.75,6065.25) 5575,6065.25 ; 5575,6065.25 cw(c5617.25,6065.25) U2.15@5587.37,6095.13 ; 5575,6065.25 cw(c5617.25,6065.25) U2.15@5587.37,6095.13 ; 5575,6065.25 cw(c5617.25,6065.25) U2.15@5587.37,6095.13 ; R19.1@5801.02,5796.54 cw(c5801.02,5682) 5882.01,5762.99 ; R19.1@5801.02,5796.54 cw(c5801.02,5682) 5882.01,5762.99 ; R19.1@5801.02,5796.54 cw(c5801.02,5682) 5882.01,5762.99 ; R19.1@5809.28,5810.83 ccw(c5856.41,5838.04) 5842.32,5785.47 ; R19.1@5809.28,5810.83 ccw(c5856.41,5838.04) 5842.32,5785.47 ; R19.1@5809.28,5810.83 ccw(c5856.41,5838.04) 5842.32,5785.47 ; BT1.2@5897.79,5476.21 ccw(c5846.57,5527.42) 5919,5527.42 ; BT1.2@5897.79,5476.21 ccw(c5846.57,5527.42) 5919,5527.42 ; BT1.2@5897.79,5476.21 ccw(c5846.57,5527.42) 5919,5527.42 ; 5919,5527.42 ccw(c5991.43,5527.42) BT1.2@5940.21,5476.21 ; 5919,5527.42 ccw(c5991.43,5527.42) BT1.2@5940.21,5476.21 ; 5919,5527.42 ccw(c5991.43,5527.42) BT1.2@5940.21,5476.21 ; 6335,5045 cw(c6335,4947.65) C3.1@6413.39,5005.37 ; 6335,5045 ccw(c6335,5131.44) C2.1@6412.52,5093.19 ; 6335,5045 cw(c6335,4947.65) C3.1@6413.39,5005.37 ; 6335,5045 ccw(c6335,5131.44) C2.1@6412.52,5093.19 ; 6335,5045 cw(c6335,4947.65) C3.1@6413.39,5005.37 ; 6335,5045 ccw(c6335,5131.44) C2.1@6412.52,5093.19 ; 6335,5045 6335,5290 6380,5335 C69.1@6513.98,5335 ; 6379.99,5032.07 ccw(c6413.97,5074.58) C3.1@6420.01,5020.49 ; 6379.99,5032.07 ccw(c6413.97,5074.58) C3.1@6420.01,5020.49 ; 6379.99,5032.07 ccw(c6413.97,5074.58) C3.1@6420.01,5020.49 ; 6384.32,5061.05 cw(c6425.23,5025.16) C2.1@6421.68,5079.47 ; 6384.32,5061.05 cw(c6425.23,5025.16) C2.1@6421.68,5079.47 ; 6384.32,5061.05 cw(c6425.23,5025.16) C2.1@6421.68,5079.47 ; C69.1@6513.98,5335 6513.98,5301.02 6575,5240 6685,5240 ; C69.1@6523.5,5331.06 ccw(c6619.03,5331.06) 6551.48,5263.52 ; C69.1@6523.5,5331.06 ccw(c6619.03,5331.06) 6551.48,5263.52 ; C69.1@6523.5,5331.06 ccw(c6619.03,5331.06) 6551.48,5263.52 ; 6685,5240 cw(c6740.98,5184.03) MC1.12@6750.41,5262.62 ; 6685,5240 cw(c6740.98,5184.03) MC1.12@6750.41,5262.62 ; 6685,5240 cw(c6740.98,5184.03) MC1.12@6750.41,5262.62 ; v4@7026.63,5753.63 cw(c6996.75,5723.75) 7039,5723.75 ; v4@7026.63,5753.63 cw(c6996.75,5723.75) 7039,5723.75 ; v4@7026.63,5753.63 cw(c6996.75,5723.75) 7039,5723.75 ; 7039,5723.75 cw(c7081.25,5723.75) v4@7051.37,5753.63 ; 7039,5723.75 cw(c7081.25,5723.75) v4@7051.37,5753.63 ; 7039,5723.75 cw(c7081.25,5723.75) v4@7051.37,5753.63 ; 7140.69,5515.31 ccw(c7203,5577.62) v4@7203,5489.5 ; 7140.69,5515.31 ccw(c7203,5577.62) v4@7203,5489.5 ; 7140.69,5515.31 ccw(c7203,5577.62) v4@7203,5489.5
  Top Layer w44: C68.2@6815,6720 6845,6750 ; C70.2@6993.98,6750 6845,6750 ; C68.2@6789,6734.97 ccw(c6803.98,6791.02) 6845,6750 ; C68.2@6789,6734.97 ccw(c6803.98,6791.02) 6845,6750 ; C68.2@6789,6734.97 ccw(c6803.98,6791.02) 6845,6750
  Bottom Layer w24: v1(4290,5385) 4415,5510 ; v1(4365,4565) 4420,4620 4420,4875 4425,4880 v1(4425,4955) ; v1@4412.27,4942.27 cw(c4381.54,4911.54) 4425,4911.54 cw(c4468.46,4911.54) v1@4437.73,4942.27 ; v1(4450,5510) 4415,5510 ; v1@4290,5403 ccw(c4290,5446.46) 4320.73,5415.73 ; v1@4290,5403 ccw(c4290,5446.46) 4320.73,5415.73 ; v1@4290,5403 ccw(c4290,5446.46) 4320.73,5415.73 ; v1@4308,5385 cw(c4351.46,5385) 4320.73,5415.73 ; v1@4308,5385 cw(c4351.46,5385) 4320.73,5415.73 ; v1@4308,5385 cw(c4351.46,5385) 4320.73,5415.73 ; 4359.52,5454.52 cw(c4450,5364.05) v1@4450,5492 ; 4359.52,5454.52 cw(c4450,5364.05) v1@4450,5492 ; 4359.52,5454.52 cw(c4450,5364.05) v1@4450,5492 ; v1@4365,4583 ccw(c4365,4626.46) 4395.73,4595.73 ; v1@4365,4583 ccw(c4365,4626.46) 4395.73,4595.73 ; v1@4365,4583 ccw(c4365,4626.46) 4395.73,4595.73 ; v1@4383,4565 cw(c4426.46,4565) 4395.73,4595.73 ; v1@4383,4565 cw(c4426.46,4565) 4395.73,4595.73 ; v1@4383,4565 cw(c4426.46,4565) 4395.73,4595.73 ; 4400.49,5495.49 cw(c4450,5445.99) v1@4450,5516 ; 4400.49,5495.49 cw(c4450,5445.99) v1@4450,5516 ; 4400.49,5495.49 cw(c4450,5445.99) v1@4450,5516 ; 4415,5510 cw(c4415,5484.97) v1@4435.36,5499.53 ; 4415,5510 ccw(c4415,5535.03) v1@4435.36,5520.47 ; 4415,5510 ccw(c4415,5535.03) v1@4435.36,5520.47 ; 4415,5510 cw(c4415,5484.97) v1@4435.36,5499.53 ; 4415,5510 ccw(c4415,5535.03) v1@4435.36,5520.47 ; 4415,5510 cw(c4415,5484.97) v1@4435.36,5499.53 ; 4420,4831.54 ccw(c4376.54,4831.54) 4407.27,4862.27 cw(c4376.54,4831.54) 4420,4831.54 ; 4420,4831.54 cw(c4463.46,4831.54) 4432.73,4862.27 ccw(c4463.46,4831.54) 4420,4831.54 ; 4427.95,5486.09 ccw(c4416.33,5529.44) v1@4455.2,5507 ; 4427.95,5486.09 ccw(c4416.33,5529.44) v1@4455.2,5507 ; 4427.95,5486.09 ccw(c4416.33,5529.44) v1@4455.2,5507
  Bottom Layer w40: BT1.2@5919,5454.99 6093.99,5280 MC1.12@6760,5280 7008,5280 7208,5480 v4@7211,5480 ; C68.2@6815,6720 6931,6720 7039,6612 v4(7039,5766) ; v4(7203,5472) v4@7211,5480 ; MC1.31@7360,5480 v4@7211,5480 ; BT1.2@5919,5424.99 cw(c5919,5352.57) 5970.21,5403.78 ; BT1.2@5919,5424.99 cw(c5919,5352.57) 5970.21,5403.78 ; BT1.2@5919,5424.99 cw(c5919,5352.57) 5970.21,5403.78 ; BT1.2@5949,5454.99 ccw(c6021.43,5454.99) 5970.21,5403.78 ; BT1.2@5949,5454.99 ccw(c6021.43,5454.99) 5970.21,5403.78 ; BT1.2@5949,5454.99 ccw(c6021.43,5454.99) 5970.21,5403.78 ; 6710.25,5280 cw(c6710.25,5237.75) MC1.12@6740.13,5267.63 ; 6710.25,5280 ccw(c6710.25,5322.25) MC1.12@6740.13,5292.37 ; 6710.25,5280 ccw(c6710.25,5322.25) MC1.12@6740.13,5292.37 ; 6710.25,5280 cw(c6710.25,5237.75) MC1.12@6740.13,5267.63 ; 6710.25,5280 ccw(c6710.25,5322.25) MC1.12@6740.13,5292.37 ; 6710.25,5280 cw(c6710.25,5237.75) MC1.12@6740.13,5267.63 ; MC1.12@6779.87,5267.63 cw(c6809.75,5237.75) 6809.75,5280 ; MC1.12@6779.87,5267.63 cw(c6809.75,5237.75) 6809.75,5280 ; MC1.12@6779.87,5267.63 cw(c6809.75,5237.75) 6809.75,5280 ; MC1.12@6779.87,5292.37 ccw(c6809.75,5322.25) 6809.75,5280 ; MC1.12@6779.87,5292.37 ccw(c6809.75,5322.25) 6809.75,5280 ; MC1.12@6779.87,5292.37 ccw(c6809.75,5322.25) 6809.75,5280 ; C68.2@6797.37,6707.63 cw(c6827.25,6677.75) C68.2@6827.25,6720 ; C68.2@6797.37,6707.63 cw(c6827.25,6677.75) C68.2@6827.25,6720 ; C68.2@6797.37,6707.63 cw(c6827.25,6677.75) C68.2@6827.25,6720 ; C68.2@6797.37,6732.37 ccw(c6827.25,6762.25) C68.2@6827.25,6720 ; C68.2@6797.37,6732.37 ccw(c6827.25,6762.25) C68.2@6827.25,6720 ; C68.2@6797.37,6732.37 ccw(c6827.25,6762.25) C68.2@6827.25,6720 ; v4@7026.63,5778.37 ccw(c6996.75,5808.25) 7039,5808.25 ; v4@7026.63,5778.37 ccw(c6996.75,5808.25) 7039,5808.25 ; v4@7026.63,5778.37 ccw(c6996.75,5808.25) 7039,5808.25 ; 7039,5808.25 ccw(c7081.25,5808.25) v4@7051.37,5778.37 ; 7039,5808.25 ccw(c7081.25,5808.25) v4@7051.37,5778.37 ; 7039,5808.25 ccw(c7081.25,5808.25) v4@7051.37,5778.37 ; 7168,5440 cw(c7203,5405.01) v4@7203,5454.5 ; 7168,5440 cw(c7203,5405.01) v4@7203,5454.5 ; 7168,5440 cw(c7203,5405.01) v4@7203,5454.5 ; v4@7215.37,5459.63 cw(c7264.56,5410.44) 7264.56,5480 ; v4@7215.37,5459.63 cw(c7264.56,5410.44) 7264.56,5480 ; v4@7215.37,5459.63 cw(c7264.56,5410.44) 7264.56,5480 ; 7310.25,5480 cw(c7310.25,5437.75) MC1.31@7340.13,5467.63 ; 7310.25,5480 ccw(c7310.25,5522.25) MC1.31@7340.13,5492.37 ; 7310.25,5480 ccw(c7310.25,5522.25) MC1.31@7340.13,5492.37 ; 7310.25,5480 cw(c7310.25,5437.75) MC1.31@7340.13,5467.63 ; 7310.25,5480 ccw(c7310.25,5522.25) MC1.31@7340.13,5492.37 ; 7310.25,5480 cw(c7310.25,5437.75) MC1.31@7340.13,5467.63
  Bottom Layer w44: C68.2@6815,6720 6855.91,6760.91 ; 6855.91,6870.08 6855.91,6760.91 ; C68.2@6786.3,6735.45 ccw(c6793.69,6823.12) 6855.9,6760.9 ; C68.2@6786.3,6735.45 ccw(c6793.69,6823.12) 6855.9,6760.9 ; C68.2@6786.3,6735.45 ccw(c6793.69,6823.12) 6855.9,6760.9
  other v2: 6625,4785 5950,5025 5950,5230 7240,5395 7165,5765
HT: C17.2 R11.2 U2.9 | length 1456.2
  Top Layer w30: C17.2@5211.02,6618.61 R11.2@5211.02,6750 5211.02,6766.02 5265,6820 5640,6820 5675,6785 U2.9@5675,6715 ; C17.2@5200.75,6632.82 ccw(c5175.95,6657.62) 5211.02,6657.62 ; C17.2@5200.75,6632.82 ccw(c5175.95,6657.62) 5211.02,6657.62 ; C17.2@5200.75,6632.82 ccw(c5175.95,6657.62) 5211.02,6657.62 ; R11.2@5200.75,6735.79 cw(c5175.95,6710.99) 5211.02,6710.99 ; R11.2@5200.75,6735.79 cw(c5175.95,6710.99) 5211.02,6710.99 ; R11.2@5200.75,6735.79 cw(c5175.95,6710.99) 5211.02,6710.99 ; 5211.02,6657.62 ccw(c5246.1,6657.62) C17.2@5221.3,6632.82 ; 5211.02,6657.62 ccw(c5246.1,6657.62) C17.2@5221.3,6632.82 ; 5211.02,6657.62 ccw(c5246.1,6657.62) C17.2@5221.3,6632.82 ; 5211.02,6710.99 cw(c5246.1,6710.99) R11.2@5221.3,6735.79 ; 5211.02,6710.99 cw(c5246.1,6710.99) R11.2@5221.3,6735.79 ; 5211.02,6710.99 cw(c5246.1,6710.99) R11.2@5221.3,6735.79 ; R11.2@5225.55,6753.94 cw(c5289.8,6753.94) 5244.37,6799.37 ; R11.2@5225.55,6753.94 cw(c5289.8,6753.94) 5244.37,6799.37 ; R11.2@5225.55,6753.94 cw(c5289.8,6753.94) 5244.37,6799.37 ; U2.9@5659.09,6738.41 ccw(c5620.68,6776.82) 5675,6776.82 ; U2.9@5659.09,6738.41 ccw(c5620.68,6776.82) 5675,6776.82 ; U2.9@5659.09,6738.41 ccw(c5620.68,6776.82) 5675,6776.82 ; 5675,6776.82 ccw(c5729.32,6776.82) U2.9@5690.91,6738.41 ; 5675,6776.82 ccw(c5729.32,6776.82) U2.9@5690.91,6738.41 ; 5675,6776.82 ccw(c5729.32,6776.82) U2.9@5690.91,6738.41
HTIN: D65.2 P1PANEL.2 | length 2102.5
  Top Layer w18: P1PANEL.2@4153.54,6266.14 4093.86,6266.14 ; D65.2@4825.04,6618.61 4761.43,6555 4651.28,6555 4625,6581.28 4625,6805 4550,6880 4220,6880 4070,6730 4070,6290 4093.86,6266.14 ; 4093.86,6266.14 cw(c4093.86,6237.08) P1PANEL.2@4118.94,6251.75 ; 4093.86,6266.14 ccw(c4093.86,6295.2) P1PANEL.2@4118.94,6280.53 ; 4093.86,6266.14 ccw(c4093.86,6295.2) P1PANEL.2@4118.94,6280.53 ; 4093.86,6266.14 cw(c4093.86,6237.08) P1PANEL.2@4118.94,6251.75 ; 4093.86,6266.14 ccw(c4093.86,6295.2) P1PANEL.2@4118.94,6280.53 ; 4093.86,6266.14 cw(c4093.86,6237.08) P1PANEL.2@4118.94,6251.75 ; 4783.28,6576.84 cw(c4825.04,6535.08) D65.2@4825.04,6594.14 ; 4783.28,6576.84 ccw(c4741.51,6618.61) D65.2@4800.58,6618.61 ; 4783.28,6576.84 ccw(c4741.51,6618.61) D65.2@4800.58,6618.61 ; 4783.28,6576.84 cw(c4825.04,6535.08) D65.2@4825.04,6594.14 ; 4783.28,6576.84 ccw(c4741.51,6618.61) D65.2@4800.58,6618.61 ; 4783.28,6576.84 cw(c4825.04,6535.08) D65.2@4825.04,6594.14
LCD_DB#4: MC1.34 P4KB.3 | length 2153.9
  Bottom Layer w16: MC1.34@7351.6,5789.45 cw(c7397.11,5762.4) 7384.06,5813.71 ; MC1.34@7360,5780 7410,5780 ; MC1.34@7365.35,5781.28 cw(c7444.07,5734.49) 7421.49,5823.24 ; MC1.34@7367.28,5777.51 ccw(c7373.83,5853.02) 7427.42,5799.42 ; MC1.34@7368.67,5793.45 ccw(c7377.71,5897.71) 7451.71,5823.71 ; MC1.34@7379.5,5773.82 cw(c7439.46,5742.97) 7422.01,5808.11 ; MC1.34@7382.25,5805.55 ccw(c7395.6,5828.67) 7402.51,5802.88 ; MC1.34@7391.81,5796.71 ccw(c7406.98,5807.13) 7411.74,5789.35 ccw(c7417.35,5768.41) MC1.34@7396.23,5773.32 ; MC1.34@7395.58,5770.95 cw(c7408,5766.95) 7408,5780 cw(c7408,5793.05) MC1.34@7395.58,5789.05 ; P4KB.3@7657.48,6166.14 7583.46,6166.14 ; 7410,5780 cw(c7410,5795.86) 7395.14,5790.32 ccw(c7410,5795.86) 7410,5780 ; 7410,5780 ccw(c7410,5764.14) 7395.14,5769.68 cw(c7410,5764.14) 7410,5780 ; 7410,5780 7517,5887 7517,6099.68 7583.46,6166.14 ; 7583.47,6166.14 cw(c7583.47,6111.44) 7625.05,6146.98 ccw(c7583.47,6111.44) 7583.47,6166.14 ; 7583.47,6166.14 ccw(c7583.47,6220.84) 7625.05,6185.31 cw(c7583.47,6220.84) 7583.47,6166.14 ; MC1.34@7367.5,5761.5 ccw(c7367.5,5819.44) 7408.47,5778.47 cw(c7367.5,5819.44) MC1.34@7367.5,5761.5 ; MC1.34@7367.5,5777.5 ccw(c7367.5,5874.07) 7435.78,5805.78 cw(c7367.5,5874.07) MC1.34@7367.5,5777.5 ; MC1.34@7367.5,5793.5 ccw(c7367.5,5928.7) 7463.1,5833.1 cw(c7367.5,5928.7) MC1.34@7367.5,5793.5 ; MC1.34@7367.5,5809.5 ccw(c7367.5,5983.32) 7490.41,5860.41 cw(c7367.5,5983.32) MC1.34@7367.5,5809.5 ; MC1.34@7379.08,5773.06 cw(c7433.65,5740.34) 7422.56,5802.99 ccw(c7433.65,5740.34) MC1.34@7379.08,5773.06 ; MC1.34@7384.4,5804.18 ccw(c7399.7,5826.06) 7404.36,5799.77 cw(c7399.7,5826.06) MC1.34@7384.4,5804.18
LCD_DB#5: MC1.30 P4KB.4 | length 1262.3
  Bottom Layer w16: MC1.30@7360,5380 7413,5380 ; MC1.30@7366.32,5377.8 ccw(c7387.22,5416.81) 7418.52,5385.52 ; MC1.30@7373.87,5391.9 ccw(c7397.85,5436.66) 7433.76,5400.76 7450,5417 7450,5765.25 7550,5865.25 7550,6025 7591.14,6066.14 ; P4KB.4@7657.48,6066.14 7591.14,6066.14 ; MC1.30@7394.43,5367.96 cw(c7413,5359.66) 7413,5380 ; MC1.30@7394.43,5367.96 cw(c7413,5359.66) 7413,5380 ; MC1.30@7394.43,5367.96 cw(c7413,5359.66) 7413,5380 ; MC1.30@7394.43,5392.04 ccw(c7413,5400.34) 7413,5380 ; MC1.30@7394.43,5392.04 ccw(c7413,5400.34) 7413,5380 ; MC1.30@7394.43,5392.04 ccw(c7413,5400.34) 7413,5380 ; 7591.14,6066.14 cw(c7591.14,6027.1) 7623.23,6049.34 ccw(c7591.14,6027.1) 7591.14,6066.14 ; 7591.14,6066.14 ccw(c7591.14,6105.18) 7623.23,6082.94 cw(c7591.14,6105.18) 7591.14,6066.14
LCD_DB#6: MC1.29 P4KB.5 | length 1267
  Bottom Layer w16: MC1.29@7388.36,5259.14 cw(c7438.72,5208.78) 7438.72,5280 ; MC1.29@7388.36,5300.86 ccw(c7438.72,5351.22) 7438.72,5280 ; P4KB.5@7657.48,5966.14 7606.14,5966.14 ; 7438.72,5280 7440,5280 7495,5335 7495,5765 7585,5855 7585,5945 ; 7585,5945 cw(c7605.95,5924.05) 7626.76,5945.14 ccw(c7605.95,5924.05) 7585,5945 ; 7585,5945 7606.14,5966.14 ; 7606.14,5966.14 cw(c7606.14,5951.93) 7619.58,5956.55 ccw(c7606.14,5951.93) 7606.14,5966.14 ; 7606.14,5966.14 ccw(c7606.14,5980.35) 7619.58,5975.73 cw(c7606.14,5980.35) 7606.14,5966.14 ; 7596.39,5956.39 cw(c7617.27,5935.52) 7638,5956.53 ccw(c7617.27,5935.52) 7596.39,5956.39 ; 7607.78,5967.78 cw(c7628.58,5946.98) 7649.24,5967.92 ccw(c7628.58,5946.98) 7607.78,5967.78
LCD_DB#7: MC1.28 P4KB.6 | length 910.7
  Bottom Layer w16: MC1.28@7388.36,5159.14 cw(c7438.72,5108.78) 7438.72,5180 ; MC1.28@7388.36,5200.86 ccw(c7438.72,5251.22) 7438.72,5180 ; P4KB.6@7657.48,5866.14 7651.14,5866.14 7540,5755 7540,5250 7470,5180 7438.72,5180
LCD_E#: MC1.35 P4KB.2 | length 2162.2
  Bottom Layer w16: MC1.35@7360,5880 7411,5880 ; MC1.35@7365.71,5881.75 cw(c7430.93,5817.92) 7429.95,5909.17 ; MC1.35@7367.36,5861.5 ccw(c7367.82,5921.08) 7409.95,5878.95 ; MC1.35@7367.48,5877.5 ccw(c7368.24,5974.69) 7436.96,5905.96 ; MC1.35@7367.61,5893.5 ccw(c7368.66,6028.3) 7463.98,5932.98 ; MC1.35@7388.13,5901.08 ccw(c7406.81,5920.16) 7407.1,5893.47 ; P4KB.2@7657.48,6266.14 7566.14,6266.14 7485,6185 7485,5954 7463.98,5932.98 ; MC1.35@7394.91,5869.09 cw(c7411,5862.68) 7411,5880 ; MC1.35@7394.91,5869.09 cw(c7411,5862.68) 7411,5880 ; MC1.35@7394.91,5869.09 cw(c7411,5862.68) 7411,5880 ; MC1.35@7394.91,5869.09 cw(c7411,5862.68) 7411,5880 ; MC1.35@7394.91,5869.09 cw(c7411,5862.68) 7411,5880 ; MC1.35@7394.91,5890.91 ccw(c7411,5897.32) 7411,5880 ; MC1.35@7394.91,5890.91 ccw(c7411,5897.32) 7411,5880 ; MC1.35@7394.91,5890.91 ccw(c7411,5897.32) 7411,5880 ; MC1.35@7394.91,5890.91 ccw(c7411,5897.32) 7411,5880 ; MC1.35@7394.91,5890.91 ccw(c7411,5897.32) 7411,5880 ; 7411,5880 7463.98,5932.98 ; 7411.98,5889.05 cw(c7407.29,5907.1) 7391.88,5896.6 ccw(c7407.29,5907.1) 7411.98,5889.05 ; 7411.98,5889.05 ccw(c7417.5,5867.79) 7396.16,5873 cw(c7417.5,5867.79) 7411.98,5889.05 ; 7463.98,5932.98 cw(c7398.01,5998.95) 7374.83,5908.58 ccw(c7398.01,5998.95) 7463.98,5932.98 ; 7576.26,6266.14 cw(c7576.26,6194.92) 7626.62,6245.28 ccw(c7576.26,6194.92) 7576.26,6266.14 ; 7576.26,6266.14 ccw(c7576.26,6337.36) 7626.62,6287 cw(c7576.26,6337.36) 7576.26,6266.14 ; MC1.35@7362.9,5862.08 ccw(c7373.71,5904.2) 7404.45,5873.45 cw(c7373.71,5904.2) MC1.35@7362.9,5862.08 ; MC1.35@7366.88,5877.58 ccw(c7381.81,5935.78) 7424.29,5893.29 cw(c7381.81,5935.78) MC1.35@7366.88,5877.58 ; MC1.35@7370.85,5893.08 ccw(c7389.91,5967.37) 7444.14,5913.14 cw(c7389.91,5967.37) MC1.35@7370.85,5893.08 ; MC1.35@7379.42,5873.67 cw(c7439.78,5841.64) 7422.61,5907.78 ccw(c7439.78,5841.64) MC1.35@7379.42,5873.67 ; MC1.35@7382.45,5905.43 ccw(c7395.98,5928.45) 7402.69,5902.61 cw(c7395.98,5928.45) MC1.35@7382.45,5905.43
LCD_RS#: MC1.36 P4KB.1 | length 987.8
  Bottom Layer w16: MC1.36@7360,5980 7420,5980 ; P4KB.1@7657.48,6366.14 7506.14,6366.14 7445,6305 7445,6005 7420,5980 ; 7420,5980 cw(c7420,6011.96) 7392.7,5995.34 ccw(c7420,6011.96) 7420,5980 ; 7420,5980 ccw(c7420,5948.04) 7392.7,5964.66 cw(c7420,5948.04) 7420,5980 ; 7576.26,6366.14 cw(c7576.26,6294.92) 7626.62,6345.28 ccw(c7576.26,6294.92) 7576.26,6366.14 ; 7576.26,6366.14 ccw(c7576.26,6437.36) 7626.62,6387 cw(c7576.26,6437.36) 7576.26,6366.14
LED: MC1.9 R3.2 | length 615.6
  Top Layer w24: R3.2@6636.02,5575 6755,5575 MC1.9@6760,5580 ; R3.2@6648.42,5562.61 cw(c6678.34,5532.68) 6678.34,5575 ; R3.2@6648.42,5562.61 cw(c6678.34,5532.68) 6678.34,5575 ; R3.2@6648.42,5562.61 cw(c6678.34,5532.68) 6678.34,5575 ; R3.2@6648.42,5587.39 ccw(c6678.34,5617.32) 6678.34,5575 ; R3.2@6648.42,5587.39 ccw(c6678.34,5617.32) 6678.34,5575 ; R3.2@6648.42,5587.39 ccw(c6678.34,5617.32) 6678.34,5575 ; 6678.87,5575 ccw(c6678.87,5653.63) MC1.9@6734.47,5598.03 ; 6678.87,5575 ccw(c6678.87,5653.63) MC1.9@6734.47,5598.03 ; 6678.87,5575 ccw(c6678.87,5653.63) MC1.9@6734.47,5598.03 ; 6703.01,5575 cw(c6703.01,5530.51) MC1.9@6734.47,5561.97 ; 6703.01,5575 cw(c6703.01,5530.51) MC1.9@6734.47,5561.97 ; 6703.01,5575 cw(c6703.01,5530.51) MC1.9@6734.47,5561.97
LLOP: C19.2 R18.2 U2.22 | length 3030.4
  Top Layer w22: C19.2@4686.02,6355.82 4686.02,6415 ; R18.2@4686.02,6487.21 4686.02,6415 ; v1(4735,6415) 4686.02,6415 ; C19.2@4672.92,6372.86 ccw(c4641.29,6404.48) 4686.02,6404.48 ; C19.2@4672.92,6372.86 ccw(c4641.29,6404.48) 4686.02,6404.48 ; C19.2@4672.92,6372.86 ccw(c4641.29,6404.48) 4686.02,6404.48 ; R18.2@4672.92,6470.17 cw(c4641.29,6438.55) 4686.02,6438.55 ; R18.2@4672.92,6470.17 cw(c4641.29,6438.55) 4686.02,6438.55 ; R18.2@4672.92,6470.17 cw(c4641.29,6438.55) 4686.02,6438.55 ; 4686.02,6404.48 ccw(c4730.75,6404.48) C19.2@4699.12,6372.86 ; 4686.02,6404.48 ccw(c4730.75,6404.48) C19.2@4699.12,6372.86 ; 4686.02,6404.48 ccw(c4730.75,6404.48) C19.2@4699.12,6372.86 ; 4686.02,6438.55 cw(c4730.75,6438.55) R18.2@4699.12,6470.17 ; 4686.02,6438.55 cw(c4730.75,6438.55) R18.2@4699.12,6470.17 ; 4686.02,6438.55 cw(c4730.75,6438.55) R18.2@4699.12,6470.17 ; 4689.13,6415 cw(c4689.13,6369.13) v1@4721.56,6401.56 ; 4689.13,6415 ccw(c4689.13,6460.87) v1@4721.56,6428.44 ; 4689.13,6415 ccw(c4689.13,6460.87) v1@4721.56,6428.44 ; 4689.13,6415 cw(c4689.13,6369.13) v1@4721.56,6401.56 ; 4689.13,6415 ccw(c4689.13,6460.87) v1@4721.56,6428.44 ; 4689.13,6415 cw(c4689.13,6369.13) v1@4721.56,6401.56
  Bottom Layer w22: v1(4735,6415) 4950,6415 5010,6355 5665,6355 5740,6280 6180,6280 6275,6185 ; U2.22@6275,6115 6275,6185 ; v1@4748.44,6401.56 cw(c4780.87,6369.13) 4780.87,6415 ; v1@4748.44,6401.56 cw(c4780.87,6369.13) 4780.87,6415 ; v1@4748.44,6401.56 cw(c4780.87,6369.13) 4780.87,6415 ; v1@4748.44,6428.44 ccw(c4780.87,6460.87) 4780.87,6415 ; v1@4748.44,6428.44 ccw(c4780.87,6460.87) 4780.87,6415 ; v1@4748.44,6428.44 ccw(c4780.87,6460.87) 4780.87,6415 ; U2.22@6256.58,6141.55 ccw(c6214.55,6185) 6275,6185 ; U2.22@6256.58,6141.55 ccw(c6214.55,6185) 6275,6185 ; U2.22@6256.58,6141.55 ccw(c6214.55,6185) 6275,6185 ; 6275,6185 ccw(c6335.45,6185) U2.22@6293.42,6141.55 ; 6275,6185 ccw(c6335.45,6185) U2.22@6293.42,6141.55 ; 6275,6185 ccw(c6335.45,6185) U2.22@6293.42,6141.55
LLOPIN: D2.2 P1PANEL.3 | length 959.8
  Top Layer w30: P1PANEL.3@4153.54,6166.14 4201.14,6166.14 ; D2.2@4300.04,6355.82 4235,6290.78 4235,6200 ; P1PANEL.3@4160.76,6159.18 ccw(c4175.24,6195.4) 4202.82,6167.82 ; P1PANEL.3@4160.76,6159.18 ccw(c4175.24,6195.4) 4202.82,6167.82 ; P1PANEL.3@4160.76,6159.18 ccw(c4175.24,6195.4) 4202.82,6167.82 ; P1PANEL.3@4171.89,6187.04 ccw(c4193.61,6241.38) 4235,6200 ; P1PANEL.3@4171.89,6187.04 ccw(c4193.61,6241.38) 4235,6200 ; P1PANEL.3@4171.89,6187.04 ccw(c4193.61,6241.38) 4235,6200 ; P1PANEL.3@4183.37,6155.51 cw(c4201.14,6145.98) 4201.14,6166.14 ; P1PANEL.3@4183.37,6155.51 cw(c4201.14,6145.98) 4201.14,6166.14 ; P1PANEL.3@4183.37,6155.51 cw(c4201.14,6145.98) 4201.14,6166.14 ; P1PANEL.3@4183.37,6176.78 ccw(c4201.14,6186.3) 4201.14,6166.14 ; P1PANEL.3@4183.37,6176.78 ccw(c4201.14,6186.3) 4201.14,6166.14 ; P1PANEL.3@4183.37,6176.78 ccw(c4201.14,6186.3) 4201.14,6166.14 ; 4201.14,6166.14 4235,6200 ; D2.2@4268.52,6324.3 cw(c4300.04,6292.78) D2.2@4300.04,6337.35 ; D2.2@4268.52,6324.3 ccw(c4237,6355.82) D2.2@4281.58,6355.82 ; D2.2@4268.52,6324.3 ccw(c4237,6355.82) D2.2@4281.58,6355.82 ; D2.2@4268.52,6324.3 cw(c4300.04,6292.78) D2.2@4300.04,6337.35 ; D2.2@4268.52,6324.3 ccw(c4237,6355.82) D2.2@4281.58,6355.82 ; D2.2@4268.52,6324.3 cw(c4300.04,6292.78) D2.2@4300.04,6337.35